# Altium PCB ALTERA256.PcbDoc (part 4 of 4)
Units mil, origin at the board's own origin, x right, y up, seen from the top; angles counter-clockwise.
Board outline 3078.86 x 1897.76 mil, 4 copper layers (TOP, L2_G, L3_P, BOTTOM), stack 34.7 mil thick; 112 components, 168 nets, 693 pads, 318 vias.
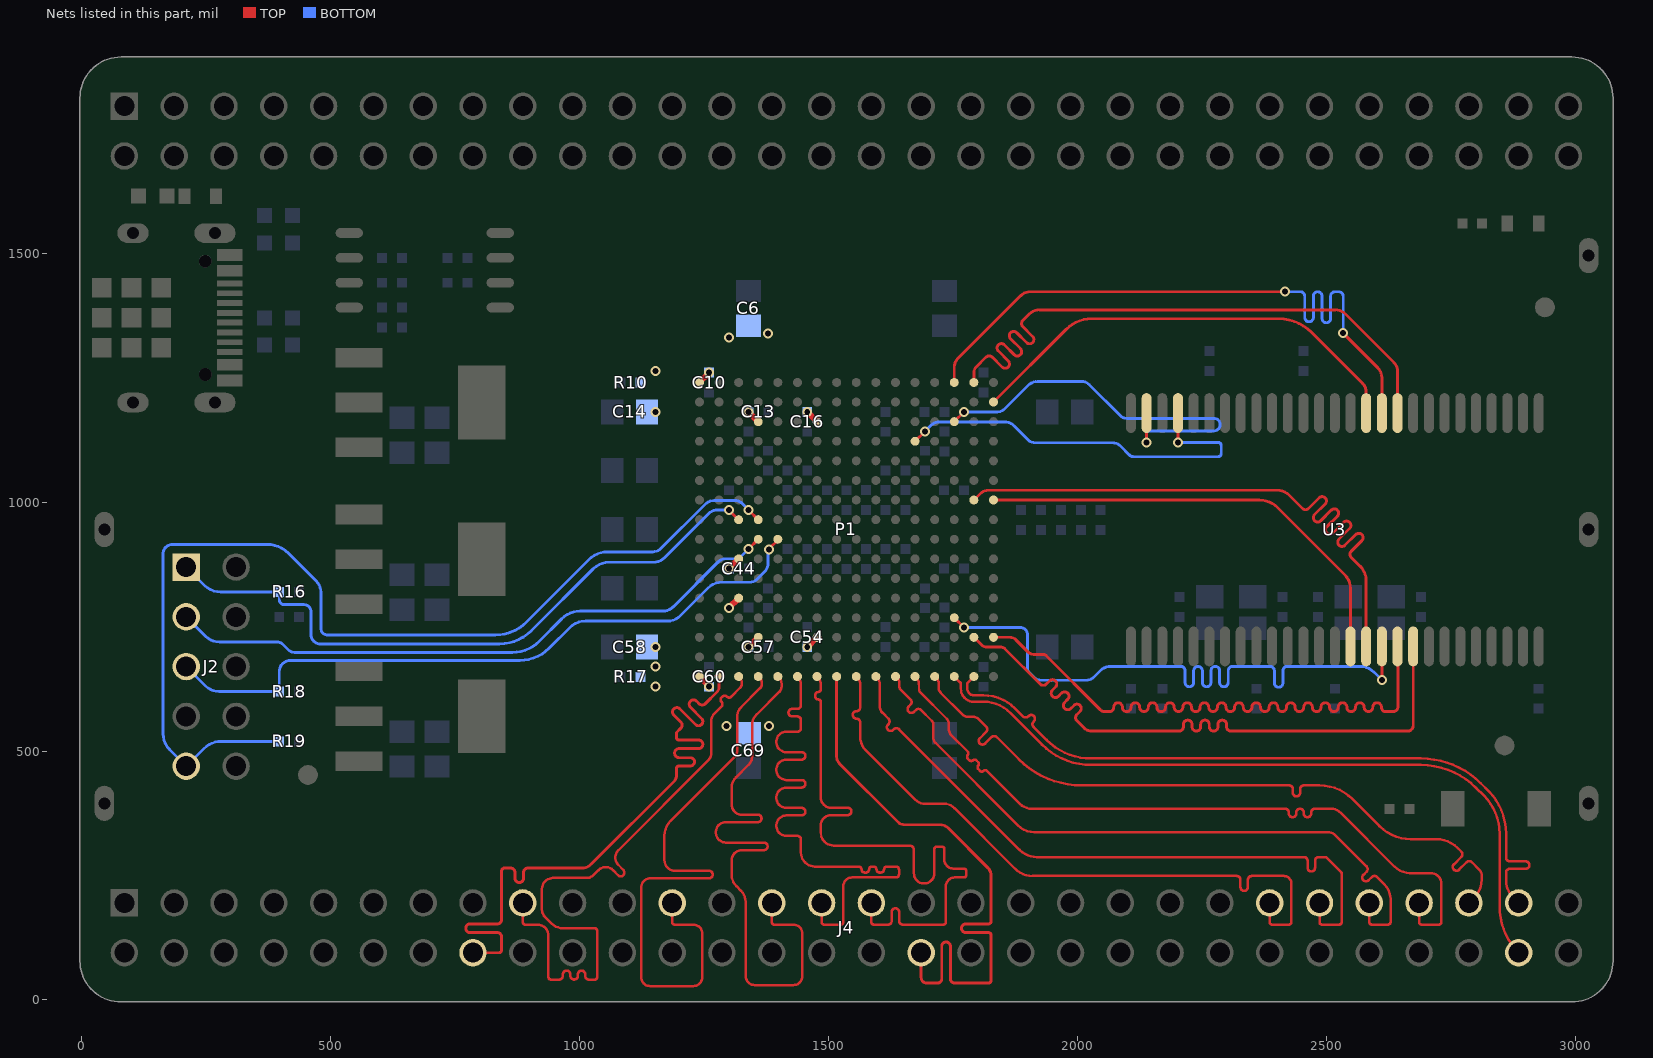
[diagram p6: the nets of this part, all layers, seen from the top]

## Via types
v1: diameter 20, hole 12, TOP to BOTTOM, 314 vias
v2: diameter 20, hole 12, TOP to BOTTOM, tented both sides, 4 vias

## Nets (pads, with @x,y where several pads share a name; then routed paths per layer and width w, separated by ;. In a path a pad name is that pad's centre, name@x,y a point inside that pad or via, vN(x,y) a via of type N, cw(c..) or ccw(c..) an arc to the next point about the centre after c; other vN are vias at no path point) (continued)
SDRAM_DQ14: P1.D12 U3.51 | length 824.8
  TOP w5.78: P1.D12@1673.54,1122.04 v1(1693.22,1141.72) ; v1(2201.46,1119.54) U3.51@2201.46,1178.54
  BOTTOM w5.78: v1(1693.22,1141.72) 1705.9,1154.4 cw(c1721.83,1138.47) 1721.83,1161 1852.99,1161 cw(c1852.99,1133.69) 1872.3,1153 1900.3,1125 ccw(c1914.79,1139.49) 1914.79,1119 2070.11,1119 cw(c2070.11,1096.81) 2085.8,1112.5 2103.6,1094.7 ccw(c2112.53,1103.62) 2112.53,1091 2282.52,1091 ccw(c2282.52,1096.78) 2288.3,1096.78 2288.3,1113.76 ccw(c2282.52,1113.76) 2282.52,1119.54 v1(2201.46,1119.54)
SDRAM_DQ15: P1.C14 U3.53 | length 836.3
  TOP w5.78: P1.C14@1752.28,1161.41 v1(1771.96,1181.09) ; v1(2138.47,1119.54) U3.53@2138.47,1178.54
  BOTTOM w5.78: v1(1771.96,1181.09) 1839.03,1181.09 ccw(c1839.03,1201.27) 1853.3,1187 1900.3,1234 cw(c1919.61,1214.69) 1919.61,1242 2007.84,1242 cw(c2007.84,1219.19) 2023.97,1235.32 2085.87,1173.42 ccw(c2098.96,1186.52) 2098.96,1168 2273.8,1168 cw(c2273.8,1155.5) 2273.8,1143 2144.25,1143 ccw(c2144.25,1137.22) 2138.47,1137.22 v1(2138.47,1119.54)
SDRAM_LDQM: P1.G16 U3.15 | length 912.3
  TOP w5.78: P1.G16@1831.02,1003.93 2365.26,1003.93 cw(c2365.26,952.96) 2401.3,989 2536.8,853.5 cw(c2509.98,826.68) 2547.91,826.68 U3.15@2547.91,710.04
SDRAM_NSCAS: P1.N14 U3.17 | length 1311
  TOP w5.78: P1.N14@1752.28,767.7 v1(1771.96,748.02) ; v1(2610.91,642.73) U3.17@2610.91,710.04
  BOTTOM w5.78: v1(1771.96,748.02) 1885.28,748.02 cw(c1885.28,734) 1899.3,734 1899.3,665.95 ccw(c1911.25,665.95) 1902.8,657.5 1912.3,648 ccw(c1926.79,662.49) 1926.79,642 2017.11,642 ccw(c2017.11,664.19) 2032.8,648.5 2045.8,661.5 cw(c2066.32,640.98) 2066.32,670 2207.03,670 cw(c2207.03,661.33) 2215.7,661.33 2215.7,637.67 ccw(c2224.37,637.67) 2233.04,637.67 2233.04,661.33 cw(c2241.71,661.33) 2250.38,661.33 2250.38,637.67 ccw(c2259.05,637.67) 2267.72,637.67 2267.72,661.33 cw(c2276.39,661.33) 2285.06,661.33 2285.06,637.67 ccw(c2293.73,637.67) 2302.4,637.67 2302.4,661.33 cw(c2311.07,661.33) 2311.07,670 2386.3,670 cw(c2386.3,661.33) 2394.97,661.33 2394.97,636.67 ccw(c2403.64,636.67) 2412.31,636.67 2412.31,661.33 cw(c2420.98,661.33) 2420.98,670 2567.3,670 cw(c2567.31,630.55) 2595.2,658.45 2595.97,657.67 v1(2610.91,642.73)
SDRAM_NSCS: P1.P15 U3.19 | length 1323.2
  TOP w5.78: P1.P15@1791.65,728.33 1806.64,713.34 ccw(c1817.96,724.66) 1817.96,708.65 1845.49,708.65 cw(c1845.49,696.19) 1854.3,705 1924.83,634.47 ccw(c1930.96,640.6) 1937.09,634.47 1943.33,640.71 cw(c1949.47,634.58) 1955.6,628.44 1949.36,622.2 ccw(c1955.49,616.07) 1961.63,609.93 1967.87,616.17 cw(c1974,610.03) 1980.14,603.9 1973.9,597.66 ccw(c1980.03,591.52) 1986.17,585.39 1992.41,591.63 ; 1992.4,591.64 cw(c1998.54,585.5) 2004.68,579.36 1998.44,573.12 ccw(c2004.57,566.99) 1998.44,560.86 2013.3,546 ccw(c2027.79,560.49) 2027.79,540 2203.7,540 ccw(c2203.7,548.67) 2212.37,548.67 2212.37,553.33 cw(c2221.04,553.33) 2229.71,553.33 2229.71,548.67 ccw(c2238.38,548.67) 2247.05,548.67 2247.05,553.33 cw(c2255.72,553.33) 2264.39,553.33 2264.39,548.67 ccw(c2273.06,548.67) 2281.73,548.67 2281.73,553.33 cw(c2290.4,553.33) 2299.07,553.33 2299.07,548.67 ccw(c2307.74,548.67) 2307.74,540 2662.66,540 ccw(c2662.66,551.24) 2673.9,551.24 U3.19@2673.9,710.04
SDRAM_NSRAS: P1.P16 U3.18 | length 1336.8
  TOP w5.78: P1.P16@1831.02,728.33 1864.14,728.33 cw(c1864.14,711.84) 1875.8,723.5 1900.8,698.5 ccw(c1911.66,709.36) 1911.66,694 1930.06,694 cw(c1930.06,683.76) 1937.3,691 2045.3,583 2045.77,582.54 ccw(c2054.31,591.07) 2054.3,579 2063.81,579 ccw(c2063.81,587.67) 2072.48,587.67 2072.48,588.33 cw(c2081.15,588.33) 2089.82,588.33 2089.82,587.67 ccw(c2098.49,587.67) 2107.16,587.67 2107.16,588.33 cw(c2115.83,588.33) 2124.5,588.33 2124.5,587.67 ccw(c2133.17,587.67) 2141.84,587.67 2141.84,588.33 cw(c2150.51,588.33) 2159.18,588.33 2159.18,587.67 ccw(c2167.85,587.67) 2176.52,587.67 2176.52,588.33 cw(c2185.19,588.33) 2193.86,588.33 2193.86,587.67 ccw(c2202.53,587.67) 2211.2,587.67 2211.2,588.33 cw(c2219.87,588.33) 2228.54,588.33 2228.54,587.67 ccw(c2237.21,587.67) 2245.88,587.67 2245.88,588.33 cw(c2254.55,588.33) 2263.22,588.33 2263.22,587.67 ccw(c2271.89,587.67) 2280.56,587.67 2280.56,588.33 cw(c2289.23,588.33) 2297.9,588.33 2297.9,587.67 ccw(c2306.57,587.67) 2315.24,587.67 2315.24,588.33 cw(c2323.91,588.33) 2332.58,588.33 2332.58,587.67 ccw(c2341.25,587.67) 2349.92,587.67 2349.92,588.33 cw(c2358.59,588.33) 2367.26,588.33 2367.26,587.67 ccw(c2375.93,587.67) 2384.6,587.67 2384.6,588.33 cw(c2393.27,588.33) 2401.94,588.33 2401.94,587.67 ccw(c2410.61,587.67) 2419.28,587.67 2419.28,588.33 cw(c2427.95,588.33) 2436.62,588.33 2436.62,587.67 ccw(c2445.29,587.67) 2453.96,587.67 2453.96,588.33 cw(c2462.63,588.33) 2471.3,588.33 2471.3,587.67 ccw(c2479.97,587.67) 2488.64,587.67 2488.64,588.33 cw(c2497.31,588.33) 2505.98,588.33 2505.98,587.67 ccw(c2514.65,587.67) 2523.32,587.67 2523.32,588.33 cw(c2531.99,588.33) 2540.66,588.33 2540.66,587.67 ccw(c2549.33,587.67) 2558,587.67 2558,588.33 cw(c2566.67,588.33) 2575.34,588.33 2575.34,587.67 ccw(c2584.01,587.67) 2592.68,587.67 2592.68,588.33 cw(c2601.35,588.33) 2610.02,588.33 2610.02,587.67 ccw(c2618.69,587.67) 2618.69,579 2633.3,579 ccw(c2633.3,589) 2643.3,589 2643.3,709.14 U3.18@2642.4,710.04
SDRAM_NWE: P1.G15 U3.16 | length 1328.5
  TOP w5.78: P1.G15@1791.65,1003.93 1805.01,1017.29 cw(c1820.27,1002.03) 1820.27,1023.61 2401.1,1023.61 cw(c2401.1,990.8) 2424.3,1014 2451.29,987.01 ccw(c2457.42,993.14) 2463.55,987.01 2484.79,1008.25 cw(c2490.93,1002.12) 2497.06,995.98 2475.82,974.74 ccw(c2481.96,968.61) 2488.09,962.47 2509.33,983.71 cw(c2515.47,977.58) 2521.6,971.44 2500.36,950.2 ccw(c2506.5,944.07) 2512.63,937.93 2533.87,959.17 cw(c2540,953.03) 2546.14,946.9 2524.9,925.66 ccw(c2531.04,919.52) 2537.18,913.38 ; 2537.17,913.39 2558.41,934.63 ; 2558.4,934.64 cw(c2564.54,928.5) 2570.68,922.36 2549.44,901.12 ccw(c2555.57,894.99) 2549.44,888.86 2567.3,871 cw(c2538.06,841.76) 2579.41,841.76 U3.16@2579.41,710.04
SDRAM_SCKE: P1.A15 U3.37 | length 1290.4
  TOP w5.78: P1.A15@1791.65,1240.15 1791.65,1259.8 cw(c1807.49,1259.8) 1796.29,1271 1816.24,1290.95 cw(c1822.37,1284.82) 1828.5,1290.95 1848.24,1271.22 ccw(c1854.38,1277.36) 1860.52,1283.5 1840.77,1303.22 cw(c1846.91,1309.36) 1853.05,1315.5 ; 1853.04,1315.49 1872.78,1295.76 ccw(c1878.92,1301.9) 1885.06,1308.04 ; 1877.58,1340.03 1897.32,1320.3 ccw(c1903.46,1326.43) 1909.59,1332.57 1889.85,1352.3 cw(c1895.98,1358.43) 1889.85,1364.56 1902.79,1377.5 cw(c1923.31,1356.98) 1923.31,1386 2517.33,1386 cw(c2517.33,1357.1) 2537.77,1377.53 2635.09,1280.21 cw(c2617.46,1262.57) 2642.4,1262.57 U3.37@2642.4,1178.54 ; 1877.59,1340.04 ccw(c1871.45,1333.9) 1865.31,1327.76 1885.05,1308.03
SDRAM_SCLK: P1.A14 U3.38 | length 1364.7
  TOP w5.78: P1.A14@1752.28,1240.15 1752.28,1271.05 cw(c1776.25,1271.05) 1759.3,1288 1885.8,1414.5 cw(c1904.8,1395.5) 1904.8,1422.37 v1(2416.3,1422.37) ; v1(2533.3,1339) 2602.8,1269.5 cw(c2583.22,1249.92) 2610.91,1249.92 U3.38@2610.91,1178.54
  BOTTOM w5.78: v1(2416.3,1422.37) 2447.38,1422.37 cw(c2447.38,1413.7) 2456.05,1413.7 2456.05,1370.67 ccw(c2464.72,1370.67) 2473.39,1370.67 2473.39,1413.7 cw(c2482.06,1413.7) 2490.73,1413.7 2490.73,1368.67 ccw(c2499.4,1368.67) 2508.07,1368.67 2508.07,1413.7 cw(c2516.74,1413.7) 2516.74,1422.37 2523.93,1422.37 cw(c2523.93,1413) 2533.3,1413 v1(2533.3,1339)
SDRAM_UDQM: P1.B16 U3.39 | length 918.8
  TOP w5.78: P1.B16@1831.02,1200.78 1977.27,1347.03 cw(c2027.89,1296.41) 2027.89,1368 2404.06,1368 cw(c2404.06,1275.67) 2469.34,1340.96 2572.77,1237.53 cw(c2556.74,1221.5) 2579.41,1221.5 U3.39@2579.41,1178.54
T2_IO_B3: J4.16 P1.T2 | length 1361.2
  TOP w5.78: J4.16@785.73,94.88 837.52,94.88 ccw(c837.52,100.66) 843.3,100.66 843.3,126.72 ccw(c834.63,126.72) 834.63,135.39 779.85,135.39 cw(c779.85,144.06) 779.85,152.73 834.63,152.73 ccw(c834.63,161.4) 843.3,161.4 843.3,259.22 cw(c849.08,259.22) 849.08,265 861.34,265 cw(c861.34,256.33) 870.01,256.33 870.01,244.67 ccw(c878.68,244.67) 887.35,244.67 887.35,256.33 cw(c896.02,256.33) 896.02,265 1004.72,265 ccw(c1004.72,290.57) 1022.8,272.49 1189.3,438.99 ccw(c1177.23,451.06) 1194.3,451.06 1194.3,464.61 cw(c1199.69,464.61) 1199.69,470 1222.26,470 ccw(c1222.26,478.28) 1222.26,486.56 1199.69,486.56 cw(c1199.69,495.69) 1199.69,504.82 1238.71,504.82 ccw(c1238.71,513.41) 1238.71,522 1199.69,522 cw(c1199.69,527.39) 1194.3,527.39 1194.3,537 1203.12,545.82 ccw(c1196.99,551.95) 1203.12,558.08 1188.87,572.33 cw(c1195,578.47) 1201.14,584.6 1232.52,553.23 ccw(c1238.66,559.37) 1244.8,565.51 ; 1234.69,600.13 1239.93,594.89 ccw(c1246.06,601.02) 1252.19,594.89 1275.8,618.5 ccw(c1266.07,628.23) 1279.83,628.23 P1.T2@1279.83,649.59 ; 1234.7,600.14 ccw(c1228.56,594) 1222.42,587.86 1244.79,565.5
T3_B2N_VREF_B3: J4.17 P1.T3 | length 1320.5
  TOP w5: J4.17@885.73,194.88 885.73,156.38 ccw(c890.73,156.38) 890.73,151.38 915.3,151.38 cw(c915.3,129.38) 937.3,129.38 937.3,46 ccw(c942.3,46) 942.3,41 958.74,41 ccw(c958.74,48.5) 966.24,48.5 966.24,51.5 cw(c973.74,51.5) 981.24,51.5 981.24,48.5 ccw(c988.74,48.5) 996.24,48.5 996.24,51.5 cw(c1003.74,51.5) 1011.24,51.5 1011.24,48.5 ccw(c1018.74,48.5) 1018.74,41 1030.3,41 ccw(c1030.3,46) 1035.3,46 1035.3,139 ccw(c1030.3,139) 1030.3,144 966.74,144 cw(c966.74,176.44) 943.8,153.5 930.3,167 cw(c944.79,181.49) 924.3,181.49 924.3,223 cw(c946.3,223) 946.3,245 1013.84,245 ccw(c1013.84,264.46) 1027.6,250.7 1037.8,260.9 cw(c1052.29,246.39) 1066.79,260.9 1077.5,250.19 ccw(c1082.43,255.12) 1087.35,250.19 ccw(c1081.67,255.88) 1087.36,261.57 1077.41,271.53 cw(c1091.92,286.02) 1077.41,300.51 1258.6,481.7 ccw(c1244.84,495.46) 1264.3,495.46 1264.3,559.81 cw(c1286.49,559.81) 1270.8,575.5 1284.92,589.62 ccw(c1280.43,594.12) 1284.92,598.62 cw(c1289.41,603.12) 1284.92,607.62 1286.53,609.23 cw(c1291.03,604.74) 1295.53,609.23 ccw(c1300.03,613.72) 1304.53,609.23 1322.47,627.17 ccw(c1315.64,634) 1325.3,634 1325.3,638 ccw(c1312.05,638) 1321.42,647.37 P1.T3@1319.2,649.59
T4_PLL1_CLKOUTN_B3: J4.23 P1.T4 | length 1242.9
  TOP w5: J4.23@1185.73,194.88 1185.73,156.38 ccw(c1190.73,156.38) 1190.73,151.38 1228.3,151.38 cw(c1228.3,133.38) 1246.3,133.38 1246.3,46 cw(c1228.3,46) 1228.3,28 1141.3,28 cw(c1141.3,46) 1123.3,46 1123.3,225.43 cw(c1142.3,225.43) 1142.3,244.43 1259.8,244.43 ccw(c1259.8,251.93) 1259.8,259.43 1191.3,259.43 cw(c1191.3,280.43) 1170.3,280.43 1170.3,329.91 cw(c1212.55,329.91) 1182.68,359.79 1310.1,487.21 ccw(c1295.13,502.17) 1316.3,502.17 1316.3,568.68 cw(c1343.62,568.7) 1322.99,586.61 cw(c1340.21,571.66) 1324.09,587.79 1362.47,626.17 ccw(c1355.64,633) 1365.3,633 1365.3,638 ccw(c1353.58,637.98) 1363.41,644.36 ccw(c1353.55,638.02) 1361.86,646.29 P1.T4@1358.57,649.59
T5_B6N_B3: J4.27 P1.T5 | length 1263.5
  TOP w5: J4.27@1385.73,194.88 1385.73,156.38 ccw(c1390.73,156.38) 1390.73,151.38 1429.3,151.38 cw(c1429.3,133.38) 1447.3,133.38 1447.3,48 cw(c1429.3,48) 1429.3,30 1351.3,30 cw(c1351.3,48) 1333.3,48 1333.3,197 ccw(c1301.92,197) 1324.11,219.19 1314.8,228.5 cw(c1337.77,251.45) 1305.3,251.45 1305.3,280.55 cw(c1325.8,280.55) 1325.8,301.05 1369.91,301.05 ccw(c1369.91,308.55) 1369.91,316.05 1293.7,316.05 cw(c1293.7,336.55) 1293.7,357.05 1357.8,357.05 ccw(c1357.8,364.55) 1357.8,372.05 1325.8,372.05 cw(c1325.8,392.55) 1305.3,392.55 1305.3,426.51 cw(c1334.03,426.51) 1313.72,446.83 1339.59,472.7 ccw(c1323.39,488.9) 1346.3,488.9 1346.3,551.26 cw(c1378.05,551.26) 1355.59,573.7 1401.32,619.44 ccw(c1391.77,629.01) 1405.3,629 1405.3,635 ccw(c1387.85,635) 1400.19,647.34 P1.T5@1397.94,649.59
T6_B7N_B3: J4.29 P1.T6 | length 1285.8
  TOP w5: P1.T6@1437.31,649.59 1438.22,648.68 cw(c1423.54,634) 1444.3,634 1444.3,592.03 cw(c1436.8,592.03) 1436.8,584.53 1426.8,584.53 ccw(c1426.8,577.03) 1426.8,569.53 1436.8,569.53 cw(c1436.8,562.03) 1444.3,562.03 1444.3,546.19 cw(c1436.8,546.19) 1436.8,538.69 1415.26,538.69 ccw(c1415.26,518.19) 1415.26,497.69 1445.8,497.69 cw(c1445.8,490.19) 1445.8,482.69 1415.26,482.69 ccw(c1415.26,462.19) 1415.26,441.69 1445.8,441.69 cw(c1445.8,434.19) 1445.8,426.69 1415.26,426.69 ccw(c1415.26,406.19) 1415.26,385.69 1445.8,385.69 cw(c1445.8,378.19) 1445.8,370.69 1415.26,370.69 ccw(c1415.26,350.19) 1415.26,329.69 1436.8,329.69 cw(c1436.8,322.19) 1444.3,322.19 1444.3,296 ccw(c1472.3,296) 1472.3,268 1560.07,268 cw(c1560.07,262) 1566.07,262 ccw(c1572.07,262) 1572.07,256 1575.07,256 ccw(c1575.07,262) 1581.07,262 cw(c1587.07,262) 1587.07,268 1590.07,268 cw(c1590.07,262) 1596.07,262 ccw(c1602.07,262) 1602.07,256 1605.07,256 ccw(c1605.07,262) 1611.07,262 cw(c1617.07,262) 1617.07,268 1635.3,268 cw(c1635.3,262) 1641.3,262 1641.3,252 cw(c1635.3,252) 1635.3,246 1547.3,246 ccw(c1547.3,228) 1529.3,228 1529.3,156.38 cw(c1524.3,156.38) 1524.3,151.38 1490.73,151.38 cw(c1490.73,156.38) 1485.73,156.38 J4.29@1485.73,194.88
T7_B8N_B3: J4.31 P1.T7 | length 1277.2
  TOP w5: P1.T7@1476.68,649.59 1478.66,647.6 cw(c1465.03,634.03) 1481.17,644.49 cw(c1465.07,633.97) 1484.3,634 1484.3,624 cw(c1478.8,624) 1478.8,618.5 ccw(c1478.8,613) 1473.3,613 1473.3,609 ccw(c1478.8,609) 1478.8,603.5 cw(c1478.8,598) 1484.3,598 1484.3,406.75 ccw(c1504.8,406.75) 1504.8,386.25 1538.1,386.25 cw(c1538.1,378.75) 1538.1,371.25 1504.8,371.25 ccw(c1504.8,350.75) 1484.3,350.75 1484.3,335.92 ccw(c1510.22,335.92) 1510.22,310 1662.44,310 cw(c1662.44,301.33) 1671.11,301.33 1671.11,254.5 ccw(c1691.61,254.5) 1712.11,254.5 1712.11,302.81 cw(c1717.3,302.81) 1717.3,308 1727.3,308 cw(c1727.3,303) 1732.3,303 1732.3,282 ccw(c1750.3,282) 1750.3,264 1771.3,264 cw(c1771.3,259) 1776.3,259 1776.3,251 cw(c1771.3,251) 1771.3,246 1753.3,246 ccw(c1753.3,228) 1735.3,228 1735.3,156.38 cw(c1730.3,156.38) 1730.3,151.38 1649.05,151.38 cw(c1649.05,158.88) 1641.55,158.88 1641.55,176.5 ccw(c1634.05,176.5) 1626.55,176.5 1626.55,158.88 cw(c1619.05,158.88) 1619.05,151.38 1590.73,151.38 cw(c1590.73,156.38) 1585.73,156.38 J4.31@1585.73,194.88
T8_CLK14_B3: J4.34 P1.T8 | length 1243.8
  TOP w5.78: P1.T8@1516.05,649.59 1516.05,488.75 ccw(c1536.57,488.75) 1522.06,474.24 1639.04,357.26 ccw(c1651.74,369.96) 1651.74,352 1724.63,352 cw(c1724.63,331.11) 1739.4,345.88 1819.65,265.64 cw(c1803.6,249.59) 1826.3,249.59 1826.3,158.54 cw(c1820.52,158.54) 1820.52,152.76 1775.43,152.76 ccw(c1775.43,144.09) 1775.43,135.42 1820.52,135.42 cw(c1820.52,129.64) 1826.3,129.64 1826.3,39.78 cw(c1820.52,39.78) 1820.52,34 1753.11,34 cw(c1753.11,42.67) 1744.44,42.67 1744.44,107.88 ccw(c1735.77,107.88) 1727.1,107.88 1727.1,42.67 cw(c1718.43,42.67) 1718.43,34 1696.73,34 cw(c1696.73,45) 1685.73,45 J4.34@1685.73,94.88
T9_B12N_CLK7N_B4: J4.47 P1.T9 | length 1346.3
  TOP w5: P1.T9@1555.43,649.59 1557.84,647.18 cw(c1544.66,634) 1563.3,634 1563.3,587.59 cw(c1555.8,587.59) 1555.8,580.09 ccw(c1555.8,572.59) 1555.8,565.09 cw(c1555.8,557.59) 1563.3,557.59 1563.3,529 ccw(c1602.86,528.99) 1574.88,501.02 1673.1,402.8 ccw(c1694.36,424.08) 1694.36,394 1731.92,394 cw(c1731.91,365.07) 1752.37,385.52 1874.29,263.6 ccw(c1909.55,298.89) 1909.55,249 2319.49,249 cw(c2319.49,241.5) 2326.99,241.5 2326.99,226.5 ccw(c2334.49,226.5) 2341.99,226.5 2341.99,241.5 cw(c2349.49,241.5) 2349.49,249 2413.94,249 cw(c2413.94,233.64) 2429.3,233.64 2429.3,156.38 cw(c2424.3,156.38) 2424.3,151.38 2390.73,151.38 cw(c2390.73,156.38) 2385.73,156.38 J4.47@2385.73,194.88
T10_B16N_B4: J4.49 P1.T10 | length 1382.8
  TOP w5: P1.T10@1594.8,649.59 1597.92,646.47 cw(c1586.45,635) 1602.67,635 1602.67,589.72 ccw(c1620.73,589.72) 1607.92,576.99 1620.18,564.73 cw(c1614.87,559.43) 1620.18,554.13 1619.09,553.04 ccw(c1624.4,547.74) 1629.7,542.43 1630.79,543.52 cw(c1636.09,538.21) 1641.39,543.52 1883.48,301.42 ccw(c1918.31,336.27) 1918.32,287 2454.23,287 cw(c2454.23,279.5) 2461.73,279.5 2461.73,265.5 ccw(c2469.23,265.5) 2476.73,265.5 2476.73,279.5 cw(c2484.23,279.5) 2484.23,287 2496.85,287 cw(c2496.84,281.99) 2500.38,285.53 2528.83,257.07 cw(c2525.3,253.53) 2530.3,253.53 2530.3,156.38 cw(c2525.3,156.38) 2525.3,151.38 2490.73,151.38 cw(c2490.73,156.38) 2485.73,156.38 J4.49@2485.73,194.88
T11_B17N_B4: J4.51 P1.T11 | length 1409
  TOP w5: P1.T11@1634.17,649.59 1638,645.77 cw(c1628.2,636.04) 1639.69,643.7 cw(c1628.23,636) 1641.95,637.53 cw(c1628.23,635.96) 1642.04,636 1642.04,629.18 ccw(c1650.47,629.18) 1644.51,623.22 1664.26,603.47 cw(c1658.96,598.16) 1664.26,592.86 1660.66,589.26 ccw(c1665.97,583.96) 1671.27,578.65 1674.88,582.25 cw(c1680.18,576.95) 1685.48,582.25 1707.01,560.72 cw(c1699.06,552.79) 1710.29,552.88 cw(c1699.18,551.72) 1710.3,552.78 1710.3,527.4 ccw(c1726.69,527.4) 1715.1,515.81 1878.1,352.81 1880.6,350.3 ccw(c1912.73,382.45) 1912.74,337 2502.2,337 cw(c2502.19,315) 2517.75,330.55 2580.15,268.15 cw(c2574.84,262.85) 2580.15,257.55 2573.75,251.15 ccw(c2579.06,245.85) 2584.36,240.54 2590.76,246.94 cw(c2596.06,241.63) 2601.36,246.94 2615.57,232.73 cw(c2584.84,202) 2628.3,202 2628.3,156.38 cw(c2623.3,156.38) 2623.3,151.38 2590.73,151.38 cw(c2590.73,156.38) 2585.73,156.38 J4.51@2585.73,194.88
T12_B18N_B4: J4.53 P1.T12 | length 1481.9
  TOP w5: P1.T12@1673.54,649.59 1675.24,647.88 cw(c1660.33,633.03) 1678.03,644.41 cw(c1660.36,632.99) 1681.32,634.83 cw(c1660.37,632.88) 1681.41,633 1681.41,624.3 ccw(c1690.59,624.3) 1684.1,617.81 1737.1,564.81 cw(c1726.95,554.68) 1741.24,555.88 ; 1741.25,555.88 cw(c1726.97,554.57) 1741.31,554.67 1741.3,545.54 ccw(c1762.85,545.51) 1744.6,534.05 ccw(c1762.23,545.12) 1747.51,530.4 ccw(c1763.55,544.74) 1747.6,530.3 1779.22,498.68 cw(c1775.82,495.29) 1779.22,491.9 ; 1779.2,491.88 ccw(c1782.6,488.49) 1779.2,485.1 1783.03,481.27 ccw(c1786.42,484.67) 1789.81,481.27 ; 1789.83,481.29 cw(c1793.22,477.89) 1796.61,481.29 1800.44,477.46 cw(c1797.04,474.07) 1800.44,470.68 ccw(c1803.82,467.27) 1800.42,463.88 1804.25,460.05 ccw(c1807.64,463.45) 1811.03,460.05 ; 1811.05,460.07 cw(c1814.44,456.67) 1817.83,460.07 1884.25,393.65 ccw(c1907.57,417) 1907.58,384 2416.53,384 cw(c2416.53,376.5) 2424.03,376.5 2424.03,374.5 ccw(c2431.53,374.5) 2439.03,374.5 2439.03,376.5 cw(c2446.53,376.5) 2454.03,376.5 2454.03,374.5 ccw(c2461.53,374.5) 2469.03,374.5 2469.03,376.5 cw(c2476.53,376.5) 2476.53,384 2508.41,384 cw(c2508.4,355.26) 2528.73,375.57 2636.68,267.62 ccw(c2667.15,298.09) 2667.15,255 2709.26,255 cw(c2709.26,233.96) 2730.3,233.96 2730.3,156.38 cw(c2725.3,156.38) 2725.3,151.38 2690.73,151.38 cw(c2690.73,156.38) 2685.73,156.38 J4.53@2685.73,194.88
T13_B20N_B4: J4.55 P1.T13 | length 1465.9
  TOP w5: P1.T13@1712.91,649.59 1717.44,645.06 cw(c1709.38,637) 1720.78,637 1720.78,627.24 ccw(c1735.53,627.24) 1725.1,616.81 1768.6,573.31 ccw(c1779.01,583.72) 1779.01,569 1789.3,569 cw(c1789.24,552.09) 1792.08,568.76 cw(c1789.31,552.08) 1801.26,564.04 1816.3,549 cw(c1810.99,543.7) 1816.3,538.4 1803.54,525.64 ccw(c1808.85,520.34) 1814.15,515.03 1826.91,527.79 cw(c1832.21,522.48) 1837.51,527.79 1881.94,483.36 ccw(c2008.38,609.84) 2008.4,431 2424.44,431 cw(c2424.44,423.5) 2431.94,423.5 2431.94,416.48 ccw(c2439.44,416.48) 2446.94,416.48 2446.94,423.5 cw(c2454.44,423.5) 2454.44,431 2485.61,431 cw(c2485.6,337.6) 2551.65,403.64 2606.14,349.15 ccw(c2669.29,412.32) 2669.3,323 2719.85,323 cw(c2719.84,261.54) 2763.3,305 2770.41,297.89 cw(c2765.1,292.59) 2770.41,287.29 2755.47,272.35 ccw(c2760.77,267.05) 2766.07,261.75 2781.02,276.68 cw(c2786.32,271.37) 2791.62,276.68 2806.35,261.95 cw(c2794.4,250) 2811.3,250 2811.3,241 cw(c2761.69,241) 2796.77,205.92 J4.55@2785.73,194.88
T14_B23P_B4: J4.58 P1.T14 | length 1491.3
  TOP w5: P1.T14@1752.28,649.59 1764,637.87 cw(c1760.46,634.34) 1765.46,634.34 1765.46,625 ccw(c1791.46,625) 1791.46,599 1810.56,599 cw(c1810.55,522.35) 1864.77,576.53 1928.3,513 ccw(c2027.28,611.98) 2027.28,472 2689.25,472 cw(c2689.25,314.95) 2800.3,426 2815.64,410.66 cw(c2739.22,334.23) 2847.3,334.23 2847.3,187.66 ccw(c2978.51,187.66) J4.58@2885.73,94.88
T15_B23N_B4: J4.57 P1.T15 | length 1489.6
  TOP w5: P1.T15@1791.65,649.59 1779.92,637.86 ccw(c1783.46,634.33) 1778.46,634.33 1778.46,625 ccw(c1791.46,625) 1791.46,612 1810.57,612 cw(c1810.56,522.34) 1873.97,585.73 1890.17,569.53 ccw(c1895.47,574.84) 1900.77,569.53 1901.47,570.23 cw(c1906.77,564.92) 1912.08,559.62 1911.38,558.92 ccw(c1916.69,553.62) 1911.38,548.32 1937.5,522.2 ccw(c2027.29,611.97) 2027.29,485 2689.26,485 cw(c2689.26,314.94) 2809.5,435.2 2824.84,419.86 cw(c2739.21,334.24) 2860.3,334.23 2860.3,285.93 ccw(c2867.8,285.93) 2867.8,278.43 2899.8,278.43 cw(c2899.8,270.93) 2899.8,263.43 2867.8,263.43 ccw(c2867.8,255.93) 2860.3,255.93 2860.3,241 ccw(c2910.25,241) 2874.93,205.68 J4.57@2885.73,194.88
TCK_F: J2.1 P1.H3 R16.1 | length 1325.5
  TOP w5.78: v1(1299.52,984.24) P1.H3@1319.2,964.56
  BOTTOM w5.78: J2.1@209.89,869.45 246.82,832.52 ccw(c278.37,864.07) 278.37,819.45 R16.1@396.7,819.45 396.7,803.98 ccw(c406.63,803.98) 397,801.56 ccw(c406.7,804) 406.7,794 446.3,794 cw(c446.3,780) 460.3,780 460.3,734 ccw(c479.3,734) 479.3,715 838.5,715 ccw(c838.5,806.25) 903.03,741.73 1027.18,865.88 cw(c1058.86,834.19) 1058.86,879 1148.57,879 ccw(c1148.57,909.73) 1170.3,888 1258.8,976.5 cw(c1277.49,957.81) 1277.49,984.24 v1(1299.52,984.24)
TDI_F: J2.9 P1.H4 R19.2 | length 2097.9
  TOP w5.78: v1(1338.89,984.24) P1.H4@1358.57,964.56
  BOTTOM w5.78: R19.2@396.7,519.45 280.42,519.45 ccw(c280.42,469.88) 245.37,504.93 J2.9@209.89,469.45 177.32,502.02 176.71,502.64 cw(c209.07,535.01) 163.3,535 163.3,896 cw(c182.3,896) 182.3,915 371.84,915 cw(c371.84,853.54) 415.3,897 470.8,841.5 cw(c447.86,818.56) 480.3,818.56 480.3,746 ccw(c493.3,746) 493.3,733 830.35,733 ccw(c830.35,822.19) 893.42,759.12 1018.9,884.6 cw(c1056.08,847.42) 1056.08,900 1147.11,900 ccw(c1147.11,922.19) 1162.8,906.5 1251.52,995.22 cw(c1270.3,976.44) 1270.3,1003 1312.24,1003 cw(c1312.24,983.95) 1325.71,997.42 v1(1338.89,984.24)
TDO_F: J2.3 P1.J4 | length 1260.7
  TOP w5.78: v1(1338.89,905.5) P1.J4@1358.57,925.18
  BOTTOM w5.78: J2.3@209.89,769.45 248.82,730.52 ccw(c276.63,758.33) 276.63,719 392.23,719 cw(c392.23,701.93) 404.3,714 415.3,703 ccw(c427.37,715.07) 427.37,698 865.25,698 ccw(c865.25,772.96) 918.26,719.96 963.91,765.61 cw(c1001.06,728.47) 1001.06,781 1167.28,781 ccw(c1167.28,810.02) 1187.8,789.5 1278.3,880 1278.65,880.34 cw(c1292.31,866.69) 1292.3,886 1310.27,886 ccw(c1310.27,908.02) 1325.84,892.45 v1(1338.89,905.5)
TMS_F: J2.5 P1.J5 R18.2 | length 1372.8
  TOP w5.78: v1(1380,905) 1380,906.12 1397.94,924.06 P1.J5@1397.94,925.18
  BOTTOM w5.78: J2.5@209.89,669.45 248.82,630.52 ccw(c275.55,657.25) 275.55,619.45 R18.2@396.7,619.45 396.7,659.4 cw(c419.3,659.4) 419.3,682 879.95,682 ccw(c879.95,764.93) 938.59,706.29 980.45,748.15 cw(c1011.47,717.13) 1011.47,761 1177.16,761 ccw(c1177.16,795.14) 1201.3,771 1257.8,827.5 cw(c1285.56,799.74) 1285.56,839 1341.8,839 ccw(c1341.8,859.49) 1356.29,845 1371.29,860 ccw(c1354.46,876.83) 1378.26,876.83 1378.26,903.26 v1(1380,905)
VCCIO: C6.1 C10.1 C13.1 C14.1 C16.1 C44.1 C54.1 C57.1 C58.1 C60.1 C69.1 P1.A1 P1.C4 P1.C7 P1.K3 P1.M3 P1.P4 P1.P7 P1.T1 R10.1 R17.1 | length 222.7
  TOP w12: P1.T1@1240.46,649.59 v1(1260.14,629.91) ; P1.A1@1240.46,1240.15 v1(1260.14,1259.83) ; v1(1299.52,787.39) P1.M3@1319.2,807.07 ; v1(1299.52,866.13) P1.K3@1319.2,885.81 ; v1(1338.89,708.65) P1.P4@1358.57,728.33 ; v1(1338.89,1181.09) P1.C4@1358.57,1161.41 ; v1(1457,708.65) P1.P7@1476.68,728.33 ; v1(1457,1181.09) P1.C7@1476.68,1161.41
  other v1: 1295,550 1380,550 1152.3,629.91 1152.3,669.28 1152.3,708.65 1152.3,1181.09 1152.3,1262.83 1300,1330 1378.26,1338.57
pads on no net: J2.6 J2.7 J2.8 P1.B9 P1.E6 P1.E7 P1.F3 P1.G5 P1.K5 P1.L3 P1.L4 P1.L7 P1.L8 U3.40 USB. USB.3 USB.5 USB.6 USB.7 USB.8 USB.9 Y1.1 Y2.1

## Polygon pours and split planes (outlines as drawn)
no net on Bottom Solder (solid): 19 vertices, not listed, extent 2732.1,1283.6 2739.8,1287.8
no net on Bottom Solder (solid): 19 vertices, not listed, extent 2732.1,1283.6 2739.8,1287.8
no net on Bottom Solder (solid): 34 vertices, not listed, extent 2987.5,279.9 3071.4,1605.4
no net on Bottom Solder (solid): 35 vertices, not listed, extent 0,279.1 83.9,1611.2
no net on Top Solder (solid): 34 vertices, not listed, extent 2987.5,279.9 3071.4,1605.4
no net on Top Solder (solid): 34 vertices, not listed, extent 0,279.1 83.9,1092.6
no net on Top Solder (solid): 130 vertices, not listed, extent 663.3,437.99 963.3,693.99
no net on Top Solder (solid): 130 vertices, not listed, extent 663.3,752.99 963.3,1008.99
no net on Top Solder (solid): 130 vertices, not listed, extent 663.3,1067.99 963.3,1323.99
no net on Top Overlay (solid): 76 vertices, not listed, extent 1041.02,476.8 1050.26,486.04
no net on Top Overlay (solid): 76 vertices, not listed, extent 1060.69,354.99 1067.03,361.33
no net on Top Overlay (solid): 76 vertices, not listed, extent 1051.77,345.87 1076.29,370.39
no net on Top Overlay (solid): 1017.78,282.49 1017.78,321.49 1170.78,321.49 1170.78,282.49 1017.78,282.49
GND on TOP "TOP-GND 2" (solid, pour order 56): 132.3,277 12.31,277 12.31,1565 132.3,1565 132.3,277
GND on TOP "TOP-GND" (solid, pour order 52): 3059.15,274 2968.3,274 2968.3,1615 3059.15,1615 3059.15,274
+1.2V on TOP "TOP-+1.2V" (solid, pour order 24): 92 vertices, not listed, extent 501.3,752 964.3,1010
+2.5V on TOP "TOP-+2.5V" (solid, pour order 30): 77 vertices, not listed, extent 501.3,437 964.3,695
+3.3V on TOP "TOP-+3.3V" (solid, pour order 44): 80 vertices, not listed, extent 501.3,1067 965.3,1327
GND on TOP "TOP-GND 1" (solid, pour order 54): 26 vertices, not listed, extent 394.3,624 638.3,1327
+5V on TOP "TOP-+5V" (solid, pour order 60): 86 vertices, not listed, extent 503.3,429.99 643.3,509.99
+5V on TOP "TOP-+5V 1" (solid, pour order 64): 79 vertices, not listed, extent 503.3,1067 643.3,1139.99
+5V on TOP "TOP-+5V 2" (solid, pour order 68): 86 vertices, not listed, extent 503.3,744.99 643.3,824.99
GND on BOTTOM "BOTTOM-GND" (solid, pour order 48): 2572.3,1308 2572.3,1451 2884.3,1451 2884.3,1214 2506.3,1214 2506.3,1242 2572.3,1308
VCCIO on BOTTOM "BOTTOM-VCCIO" (solid, pour order 16): 86 vertices, not listed, extent 1289.15,1328.73 1389.15,1378.73
VCCIO on BOTTOM "BOTTOM-VCCIO 1" (solid, pour order 18): 1160.3,1154 1112.3,1154 1110.3,1156 1110.3,1271 1112.3,1273 1159.3,1273 1162.3,1270 1162.3,1156 1160.3,1154
VCCIO on BOTTOM "BOTTOM-VCCIO 2" (solid, pour order 20): 86 vertices, not listed, extent 1289.15,511.81 1389.15,561.81
VCCIO on BOTTOM "BOTTOM-VCCIO 3" (solid, pour order 22): 86 vertices, not listed, extent 1111.15,610.73 1161.15,740.73
+1.2V on BOTTOM "BOTTOM-+1.2V" (solid, pour order 26): 17 vertices, not listed, extent 686.3,830 1162.3,1144
+2.5V on BOTTOM "BOTTOM-+2.5V" (solid, pour order 28): 86 vertices, not listed, extent 1005.15,622.99 1095.15,672.99
+2.5V on BOTTOM "BOTTOM-+2.5V 1" (solid, pour order 32): 48 vertices, not listed, extent 677.3,507.99 747.3,577
+2.5V on BOTTOM "BOTTOM-+2.5V 2" (solid, pour order 34): 1108.3,801 1108.3,851 1112.3,855 1165.3,855 1189.3,879 1213.3,879 1217.3,875 1217.3,853 1163.3,799 1110.3,799 1108.3,801
+3.3V on BOTTOM "BOTTOM-+3.3V" (solid, pour order 36): 86 vertices, not listed, extent 1682.85,1328.73 1782.85,1378.73
+3.3V on BOTTOM "BOTTOM-+3.3V 1" (solid, pour order 38): 86 vertices, not listed, extent 1914.15,1131.17 1964.15,1231.17
+3.3V on BOTTOM "BOTTOM-+3.3V 2" (solid, pour order 40): 86 vertices, not listed, extent 1914.15,658.73 1964.15,758.73
+3.3V on BOTTOM "BOTTOM-+3.3V 3" (solid, pour order 42): 86 vertices, not listed, extent 1682.85,511.81 1782.85,561.81
+3.3V on BOTTOM "BOTTOM-+3.3V 4" (solid, pour order 46): 914.3,1144 687.3,1144 684.3,1147 684.3,1285 686.3,1287 1092.3,1287 1094.3,1285 1094.3,1220 1093.3,1219 989.3,1219 914.3,1144
GND on BOTTOM "BOTTOM-GND 1" (solid, pour order 50): 3059.15,274 2968.3,274 2968.3,1615 3059.15,1615 3059.15,274
GND on BOTTOM "BOTTOM-GND 2" (solid, pour order 58): 40 vertices, not listed, extent 12.31,277 1089.3,1625
+5V on BOTTOM "BOTTOM-+5V" (solid, pour order 62): 86 vertices, not listed, extent 503.3,429.99 673.3,499.99
+5V on BOTTOM "BOTTOM-+5V 1" (solid, pour order 66): 86 vertices, not listed, extent 503.3,1059.99 673.3,1129.99
+5V on BOTTOM "BOTTOM-+5V 2" (solid, pour order 70): 86 vertices, not listed, extent 503.3,744.99 673.3,814.99
+5V on BOTTOM "BOTTOM-+5V 3" (solid, pour order 74): 272.3,1481 277.3,1486 370.3,1486 375.3,1481 375.3,1427 370.3,1422 276.3,1422 272.3,1426 272.3,1481
+3.3V on L3_P (split plane): 67 vertices, not listed, extent 444.57,16.04 3055.12,1873.72
+5V on L3_P (split plane): 40 vertices, not listed, extent 16.34,423.1 787.64,1873.72
+2.5V on L3_P (split plane): 43 vertices, not listed, extent 16.34,16.04 1167.2,925.26
VCCIO on L3_P (split plane): 44 vertices, not listed, extent 797.84,535.46 1489.37,1371.56
+3.3V on L3_P (split plane): 1090.91,1164.93 1091.3,1162.98 1092.41,1161.33 1094.06,1160.22 1096.01,1159.83 1313.2,1159.83 1313.2,1008.1 1280.09,1008.1 1204.23,1083.96 1202.57,1085.07 1200.62,1085.46 994.4,1085.46 994.4,1269.69 1001.61,1276.9 1090.91,1276.9
+1.2V on L3_P (split plane): 23 vertices, not listed, extent 994.4,734.1 1745.52,1159.83
GND on L2_G (split plane): 69 vertices, not listed, extent 16.34,16.04 3055.12,1873.72

## Keep-outs
OUTLINE:
  lines w8: 0.3,78.74 ccw(c79.04,78.74) 79.04,0 2992.42,0 ccw(c2992.42,78.74) 3071.16,78.74 3071.16,1811.02 ccw(c2992.42,1811.02) 2992.42,1889.76 79.04,1889.76 ccw(c79.04,1811.02) 0.3,1811.02 0.3,78.74

## Other copper
TOP:
  pour cut-out: 728.61,801.99 727.45,807.85 724.13,812.82 719.16,816.14 713.3,817.3 707.44,816.14 702.47,812.82 699.15,807.85 697.99,801.99 699.15,796.13 702.47,791.16 707.44,787.84 713.3,786.68 719.16,787.84 724.13,791.16 727.45,796.13 728.61,801.99
  pour cut-out: 728.61,486.99 727.45,492.85 724.13,497.82 719.16,501.14 713.3,502.3 707.44,501.14 702.47,497.82 699.15,492.85 697.99,486.99 699.15,481.13 702.47,476.16 707.44,472.84 713.3,471.68 719.16,472.84 724.13,476.16 727.45,481.13 728.61,486.99
BOTTOM:
  pour cut-out: 1018.3,1098 1104.3,1098 1109.3,1093 1109.3,1031 1008.3,1031 1001.3,1038 1001.3,1081 1018.3,1098
  pour cut-out: 251.1,1265.38 249.53,1277.31 244.93,1288.42 237.61,1297.97 228.06,1305.29 216.95,1309.89 205.02,1311.46 193.09,1309.89 181.98,1305.29 172.43,1297.97 165.11,1288.42 160.51,1277.31 158.94,1265.38 160.51,1253.45 165.11,1242.34 172.43,1232.79 181.98,1225.47 193.09,1220.87 205.02,1219.3 216.95,1220.87 228.06,1225.47 237.61,1232.79 244.93,1242.34 249.53,1253.45 251.1,1265.38
  pour cut-out: 251.11,1438.6 249.54,1450.53 244.94,1461.65 237.61,1471.19 228.07,1478.52 216.95,1483.12 205.02,1484.69 193.09,1483.12 181.97,1478.52 172.43,1471.19 165.1,1461.65 160.5,1450.53 158.93,1438.6 160.5,1426.67 165.1,1415.55 172.43,1406.01 181.97,1398.68 193.09,1394.08 205.02,1392.51 216.95,1394.08 228.07,1398.68 237.61,1406.01 244.94,1415.55 249.54,1426.67 251.11,1438.6
  pour cut-out: 215.54,1098 214.65,1104.79 212.03,1111.12 207.86,1116.56 202.42,1120.73 196.09,1123.35 189.3,1124.24 182.51,1123.35 176.18,1120.73 170.74,1116.56 166.57,1111.12 163.95,1104.79 163.06,1098 163.95,1091.21 166.57,1084.88 170.74,1079.44 176.18,1075.27 182.51,1072.65 189.3,1071.76 196.09,1072.65 202.42,1075.27 207.86,1079.44 212.03,1084.88 214.65,1091.21 215.54,1098
  pour cut-out: 1109.3,1031 1008.3,1031 1001.3,1038 1001.3,1081 1018.3,1098 1104.3,1098 1109.3,1093 1109.3,1031
L3_P (plane layer: these items are gaps in the copper):
  lines w10: -5.53,930.36 318.1,930.36 459.47,788.99 459.47,453.2 494.67,418 664.72,418 679.47,432.75 679.47,731.49 792.74,844.76 ; 439.47,1893.76 439.47,1115.36 792.74,1115.36 ; 1126.8,-4.64 1126.8,530.36 ; 1494.47,729 1494.47,530.36 1126.8,530.36 ; 1494.47,1164.93 1494.47,1376.65 792.74,1376.65 792.74,844.76 ; 792.74,844.76 1162.1,844.76 1172.3,834.56 1172.3,762.35 1126.8,716.85 1126.8,530.36 ; 989.3,1080.36 1200.62,1080.36 1277.98,1003 1318.3,1003 1318.3,1164.93 ; 989.3,1080.36 989.3,1038.88 1101.42,926.76 1262.31,926.76 1318.3,870.76 1318.3,729 1750.62,729 1750.62,1164.93 1318.3,1164.93 ; 989.3,1080.36 989.3,1271.8 999.5,1282 1096.01,1282 1096.01,1164.93 1318.3,1164.93

## Silkscreen, mask and mechanical layers (free items; w line width, h text height)
Top Overlay:
  drawing of 3119 lines, arcs and shapes, not listed
  text "LED0" at 2815,1495 h32
  text "ALTERA CycloneIV FPGA C406" at 1205,1450 h32
  text "3.3V" at 979.3,1189 h32
  text "JTAG" at 306.3,1082 h32
  text "1.2V" at 979.3,874 h32
  text "2.5V" at 979.3,559 h32
  text "KEY" at 2802.3,274 h32
Bottom Overlay:
  text "E1" at 470,1590 h32 r270
  text "G1" at 565,1590 h32 r270
  text "F1" at 665,1590 h32 r270
  text "GND" at 155,1550 h32 r270
  text "5V" at 94.3,1548 h32 r270
  text "DCL" at 269.3,1548 h32 r270
  text "C2" at 804.3,1548 h32 r270
  text "C3" at 869.3,1548 h32 r270
  text "GND" at 969.3,1548 h32 r270
  text "B1" at 1069.3,1548 h32 r270
  text "A2" at 1169.3,1548 h32 r270
  text "A5" at 1264.3,1548 h32 r270
  text "A4" at 1384.3,1548 h32 r270
  text "A6" at 1469.3,1548 h32 r270
  text "A8" at 1569.3,1548 h32 r270
  text "D5" at 1654.3,1548 h32 r270
  text "A7" at 1779.3,1548 h32 r270
  text "D6" at 1869.3,1548 h32 r270
  text "E8" at 1969.3,1548 h32 r270
  text "GND" at 2069.3,1548 h32 r270
  text "A9" at 2169.3,1548 h32 r270
  text "F9" at 2269.3,1548 h32 r270
  text "C9" at 2369.3,1548 h32 r270
  text "A10" at 2469.3,1548 h32 r270
  text "A11" at 2569.3,1548 h32 r270
  text "A12" at 2669.3,1548 h32 r270
  text "A13" at 2769.3,1548 h32 r270
  text "E16" at 2869.3,1548 h32 r270
  text "GND" at 2943.3,1548 h32 r270
  text "F2" at 665,1520 h32 r270
  text "NDA" at 390,1515 h32 r270
  text "G2" at 565,1515 h32 r270
  text "NCO" at 470,1475 h32 r270
  text "5V" at 94.3,1448 h32 r270
  text "GND" at 154.3,1448 h32 r270
  text "D1" at 804.3,1448 h32 r270
  text "D3" at 869.3,1448 h32 r270
  text "GND" at 969.3,1448 h32 r270
  text "B3" at 1069.3,1448 h32 r270
  text "A3" at 1169.3,1448 h32 r270
  text "B5" at 1264.3,1448 h32 r270
  text "B4" at 1384.3,1448 h32 r270
  text "B6" at 1469.3,1448 h32 r270
  text "B8" at 1569.3,1448 h32 r270
  text "C6" at 1654.3,1448 h32 r270
  text "B7" at 1779.3,1448 h32 r270
  text "D8" at 1869.3,1448 h32 r270
  text "F8" at 1969.3,1448 h32 r270
  text "GND" at 2069.3,1448 h32 r270
  text "C8" at 2169.3,1448 h32 r270
  text "E9" at 2269.3,1448 h32 r270
  text "D9" at 2369.3,1448 h32 r270
  text "B10" at 2469.3,1448 h32 r270
  text "B11" at 2569.3,1448 h32 r270
  text "B12" at 2669.3,1448 h32 r270
  text "B13" at 2769.3,1448 h32 r270
  text "E15" at 2869.3,1448 h32 r270
  text "NST" at 370,1440 h32 r270
  text "CON" at 265,1435 h32 r270
  text "GND" at 2945,1420 h32 r270
  text "P/N" at 2922.3,1091 h32
  text "REV:1.1" at 2922.3,986.85 h32
  text "GND" at 94.3,358 h32 r270
  text "N1" at 169.3,358 h32 r270
  text "P1" at 269.3,358 h32 r270
  text "J1" at 369.3,358 h32 r270
  text "K1" at 469.3,358 h32 r270
  text "L1" at 569.3,358 h32 r270
  text "M1" at 669.3,358 h32 r270
  text "R1" at 769.3,358 h32 r270
  text "T3" at 869.3,358 h32 r270
  text "GND" at 969.3,358 h32 r270
  text "P3" at 1069.3,358 h32 r270
  text "T4" at 1169.3,358 h32 r270
  text "N6" at 1269.3,358 h32 r270
  text "T5" at 1369.3,358 h32 r270
  text "T6" at 1469.3,358 h32 r270
  text "T7" at 1569.3,358 h32 r270
  text "P6" at 1669.3,358 h32 r270
  text "M7" at 1769.3,358 h32 r270
  text "N8" at 1869.3,358 h32 r270
  text "P9" at 1969.3,358 h32 r270
  text "GND" at 2069.3,358 h32 r270
  text "M10" at 2169.3,358 h32 r270
  text "N11" at 2269.3,358 h32 r270
  text "T9" at 2369.3,358 h32 r270
  text "T10" at 2469.3,358 h32 r270
  text "T11" at 2569.3,358 h32 r270
  text "T12" at 2669.3,358 h32 r270
  text "T13" at 2769.3,358 h32 r270
  text "T15" at 2869.3,358 h32 r270
  text "GND" at 2943.3,358 h32 r270
  text "GND" at 94.3,258 h32 r270
  text "N2" at 169.3,258 h32 r270
  text "P2" at 269.3,258 h32 r270
  text "J2" at 369.3,258 h32 r270
  text "K2" at 469.3,258 h32 r270
  text "L2" at 569.3,258 h32 r270
  text "M2" at 669.3,258 h32 r270
  text "T2" at 769.3,258 h32 r270
  text "R3" at 869.3,258 h32 r270
  text "GND" at 969.3,258 h32 r270
  text "N3" at 1069.3,258 h32 r270
  text "R4" at 1169.3,258 h32 r270
  text "N5" at 1269.3,258 h32 r270
  text "R5" at 1369.3,258 h32 r270
  text "R6" at 1469.3,258 h32 r270
  text "R7" at 1569.3,258 h32 r270
  text "T8" at 1669.3,258 h32 r270
  text "M6" at 1769.3,258 h32 r270
  text "P8" at 1869.3,258 h32 r270
  text "M8" at 1969.3,258 h32 r270
  text "GND" at 2069.3,258 h32 r270
  text "N9" at 2169.3,258 h32 r270
  text "P11" at 2269.3,258 h32 r270
  text "R9" at 2369.3,258 h32 r270
  text "R10" at 2469.3,258 h32 r270
  text "R11" at 2569.3,258 h32 r270
  text "R12" at 2669.3,258 h32 r270
  text "R13" at 2769.3,258 h32 r270
  text "T14" at 2869.3,258 h32 r270
  text "GND" at 2943.3,258 h32 r270

## Text inside footprints (layer, text, board x,y; h text height)
P1: Top Overlay "T" at 1169.01,629.91 h32; Top Overlay "R" at 1169.01,669.28 h32; Top Overlay "P" at 1169.01,708.65 h32; Top Overlay "N" at 1169.01,748.02 h32; Top Overlay "M" at 1169.01,787.39 h32; Top Overlay "L" at 1169.01,826.76 h32; Top Overlay "K" at 1169.01,866.13 h32; Top Overlay "J" at 1169.01,905.5 h32; Top Overlay "H" at 1169.01,944.87 h32; Top Overlay "G" at 1169.01,984.24 h32; Top Overlay "F" at 1169.01,1023.61 h32; Top Overlay "E" at 1169.01,1062.98 h32; Top Overlay "D" at 1169.01,1102.35 h32; Top Overlay "C" at 1169.01,1141.72 h32; Top Overlay "B" at 1169.01,1181.09 h32; Top Overlay "A" at 1169.01,1220.46 h32; Top Overlay "5" at 1395.88,1309.53 h32 r90; Top Overlay "4" at 1356.51,1309.53 h32 r90; Top Overlay "3" at 1317.14,1309.53 h32 r90; Top Overlay "2" at 1277.77,1309.53 h32 r90; Top Overlay "1" at 1238.4,1309.53 h32 r90; Top Overlay "10" at 1580.33,1309.53 h32 r90; Top Overlay "9" at 1553.36,1309.53 h32 r90; Top Overlay "8" at 1513.99,1309.53 h32 r90; Top Overlay "7" at 1474.62,1309.53 h32 r90; Top Overlay "6" at 1435.25,1309.53 h32 r90; Top Overlay "15" at 1777.18,1309.53 h32 r90; Top Overlay "14" at 1737.81,1309.53 h32 r90; Top Overlay "13" at 1698.44,1309.53 h32 r90; Top Overlay "12" at 1659.07,1309.53 h32 r90; Top Overlay "11" at 1619.7,1309.53 h32 r90; Top Overlay "16" at 1816.55,1309.53 h32 r90
T1: PIN_NUMBER "1" at 3016.16,394.88 h32 r90
T2: PIN_NUMBER "1" at 3016.16,944.88 h32 r90
T3: PIN_NUMBER "1" at 3016.16,1494.88 h32 r90
T4: PIN_NUMBER "1" at 35.3,394.88 h32 r90
T5: PIN_NUMBER "1" at 35.3,944.88 h32 r90